# Altium PCB AIRZAI_NFC_READER_FLEX.PcbDoc (part 2 of 2)
Units mil, origin at the board's own origin, x right, y up, seen from the top; angles counter-clockwise.
Board outline 2897.24 x 5925.59 mil, 2 copper layers (Top Layer, Bottom Layer); 45 components, 43 nets, 193 pads, 92 vias.
Unrouted connection lines stored in the file: 129.
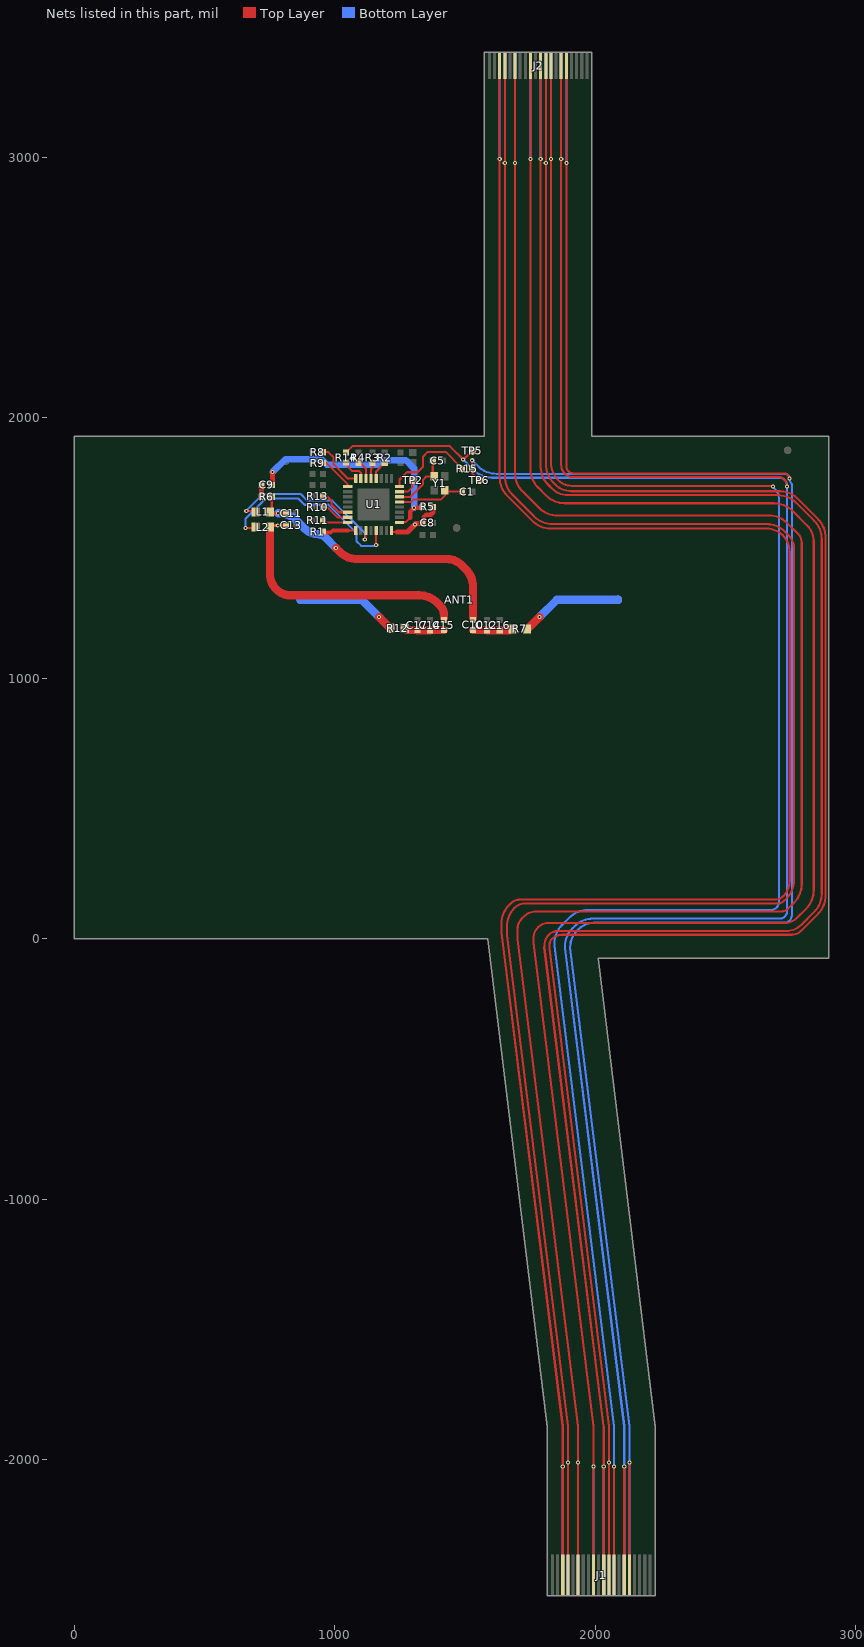
[diagram p2: the nets of this part, all layers, seen from the top]

## Via types
v1: diameter 16, hole 8, Top Layer to Bottom Layer, tented both sides, 81 vias
v2: diameter 19.68, hole 8, Top Layer to Bottom Layer, 9 vias
v3: diameter 30, hole 15, Top Layer to Bottom Layer, tented both sides, 2 vias

## Nets (pads, with @x,y where several pads share a name; then routed paths per layer and width w, separated by ;. In a path a pad name is that pad's centre, name@x,y a point inside that pad or via, vN(x,y) a via of type N, cw(c..) or ccw(c..) an arc to the next point about the centre after c; other vN are vias at no path point) (continued)
"LED Str DATA": J1.11 J2.11 | length 8505.9
  Top Layer w8: J2.11@1790.57,3351.56 1790.57,1810.63 ccw(c1885.55,1810.63) 1818.39,1743.47 1828.1,1733.76 ccw(c1898.81,1804.47) 1835.31,1727.22 ccw(c1895.09,1787) 1895.09,1702.46 2703.37,1702.46 cw(c2703.37,1609.34) 2769.21,1675.18 2840.55,1603.84 cw(c2769.84,1533.13) 2869.84,1533.13 2869.84,173.08 cw(c2769.84,173.08) 2840.55,102.36 2791.84,53.65 cw(c2731.49,114.01) 2731.49,28.65 1855.64,28.65 ccw(c1855.64,-19.15) 1821.84,14.65 ccw(c1864.02,-27.53) 1804.37,-27.53 1804.37,-32.08 ; 1804.14,-32.31 2032.5,-1873.7 v1@2032.5,-2027.53 ; J1.11@2032.69,-2444.11 v1(2032.69,-2027.53)
  Bottom Layer w8: v1@1790.57,2993.65 J2.11@1790.57,3351.56 ; J1.11@2032.69,-2444.11 v1(2032.69,-2027.53)
  other v1: 1790.57,2993.38
NetANT1_1: ANT1.1 R7.1 | length 396.1
  Top Layer w31.5: R7.1@1737.62,1189.13 ccw(c1737.62,1196.05) 1742.52,1191.16 v1(1785.73,1234.36)
  Bottom Layer w31.5: v1(1785.73,1234.36) 1852.15,1300.78 ; 1852.15,1300.8 ANT1.1@2087.74,1300.8
NetANT1_2: ANT1.2 R12.1 | length 391
  Top Layer w31.5: v1@1170.39,1234.46 R12.1@1213.5,1191.35
  Bottom Layer w31.5: ANT1.2@867.74,1300.8 1037.71,1300.8 ; 1037.71,1300.78 1103.88,1300.78 v1(1170.3,1234.36)
NetC1_2: C1.2 U1.21 Y1.3 | length 268.4
  Top Layer w8: U1.21@1248.63,1676.6 1294.02,1676.6 1303.71,1686.3 1408.5,1686.3 1422.75,1700.55 Y1.3@1422.75,1721.5 1427.86,1716.39 C1.2@1484.04,1716.39
NetC5_2: C5.2 U1.22 Y1.1 | length 236.2
  Top Layer w8: U1.22@1248.63,1696.29 1290.74,1696.29 1338.04,1743.59 1338.04,1760.52 1352.04,1774.52 1381.25,1774.52 Y1.1@1381.38,1774.65 1376.04,1779.99 C5.2@1376.04,1833.52
NetC9_1: C9.1 R6.2 | length 46.1
  Top Layer w20: R6.2@718.46,1696.21 718.78,1696.53 C9.1@718.78,1742.21
NetC9_2: C9.2 R5.2 U1.17 | length 919.8
  Top Layer w8: U1.17@1248.63,1597.86 1250.73,1599.97 1273.79,1599.97 1289.04,1615.21
  Top Layer w17: 1289.04,1615.21 1289.04,1638.83 v1(1304.4,1654.18) 1333.58,1654.18 R5.2@1336.89,1657.49
  Top Layer w20: C9.2@758.15,1742.21 C9.2@759.96,1744.03 ; C9.2@761.23,1744.03 v1(761.23,1791.09)
  Bottom Layer w25: v1(761.23,1791.09) 811.19,1841.04 948.42,1841.04 969.7,1819.76 1162.14,1819.76 1178.68,1836.3 1273.3,1836.3 1304.4,1805.21 v1(1304.4,1654.18)
NetC10_1: C10.1 C12.2 C16.2 R7.2 | length 152.8
  Top Layer w31.5: C10.1@1531.16,1184.44 1583.72,1184.44 C12.2@1584.06,1184.09 C16.2@1633.09,1184.1 1670.36,1184.1 ccw(c1670.36,1201.27) R7.2@1682.5,1189.13
NetC10_2: C10.2 C11.2 L1.2 R6.1 | length 1115.1
  Top Layer w10: R6.1@757.83,1696.21 757.83,1645.03 L1.2@751.02,1638.22 756.02,1633.21 v1(782.61,1633.21) C11.2@812.21,1633.21 C11.2@815.21,1633.21
  Top Layer w31.5: v1@1004.47,1499.65 1018.99,1485.13 ccw(c1086.59,1552.72) 1086.59,1457.13 1430.12,1457.13 cw(c1430.12,1375.18) 1488.06,1433.13 1501.87,1419.32 cw(c1431.16,1348.61) 1531.16,1348.61 1531.16,1262.12 C10.2@1531.16,1230.12
  Bottom Layer w31.5: v1(782.61,1633.21) 784.55,1633.21 cw(c784.55,1533.21) 855.26,1603.93 887.68,1571.51 ccw(c932.06,1615.9) 932.06,1553.13 cw(c932.06,1507.42) 964.37,1539.75 1003.53,1500.59 1003.53,1499.97 v1(1003.84,1499.65)
NetC13_1: C13.1 C15.2 L2.2 | length 1011.1
  Top Layer w10: L2.2@751.02,1580.22 757.02,1586.21 v1(781.24,1586.21) C13.1@812.21,1586.21 C13.1@815.21,1586.21
  Top Layer w31.5: L2.2@751.02,1580.22 751.02,1400.62 ccw(c836.52,1400.62) 776.06,1340.17 ccw(c829.27,1393.37) 829.27,1318.13 1323.64,1318.13 cw(c1323.64,1218.13) 1394.35,1288.84 1404.06,1279.13 cw(c1368.36,1243.42) 1418.85,1243.42 C15.2@1418.85,1231.13
NetC14_1: C14.1 C15.1 C17.1 R12.2 | length 152.3
  Top Layer w31.5: R12.2@1268.62,1191.35 ccw(c1285.67,1208.4) 1285.67,1184.28 C17.1@1317.06,1184.28 1317.26,1184.09 C14.1@1365.75,1184.09 1365.94,1184.28 C15.1@1418.85,1184.28
NetL1_1: L1.1 U1.11 | length 646.1
  Top Layer w8: v1(660.24,1641.98) 692.14,1641.98 L1.1@695.9,1638.22 ; v1(1115.24,1531.98) 1117.63,1531.98 1116.77,1532.84 1116.77,1535.67 1118.58,1537.48 1118.58,1566.24 U1.11@1119.54,1567.19
  Bottom Layer w8: v1(660.24,1641.98) 725.91,1707.65 868.43,1707.65 894.42,1681.65 990.84,1681.65 1115.24,1557.25 v1(1115.24,1531.98)
NetL2_1: L2.1 U1.13 | length 761
  Top Layer w8: v1(657.24,1575.98) 691.67,1575.98 L2.1@695.9,1580.22 ; v1(1158.91,1510.65) U1.13@1158.91,1567.19
  Bottom Layer w8: v1(657.24,1575.98) 657.24,1611.53 735.36,1689.65 859.85,1689.65 883.84,1665.65 974.84,1665.65 1082.84,1557.65 1082.84,1526.77 1101.63,1507.98 1156.23,1507.98 v1(1158.91,1510.65)
NetR1_1: R1.1 U1.9 | length 124.2
  Top Layer w8: 1050.58,1566.37 1079.7,1566.73 U1.9@1080.17,1567.19
  Top Layer w15: R1.1@959.38,1558.81 984.01,1558.71 991.95,1566.59 1050.58,1566.37
NetR2_2: R2.2 U1.28 | length 74.9
  Top Layer w8: U1.28@1158.91,1766.33 1158.91,1793.48 1192.37,1826.95 R2.2@1192.04,1827.27
NetR3_2: R3.2 U1.29 | length 64.2
  Top Layer w8: U1.29@1139.22,1766.33 1139.22,1802.56 1146.04,1809.39 1146.04,1826.27 R3.2@1145.04,1827.27
NetR4_2: R4.2 U1.30 | length 70.2
  Top Layer w8: R4.2@1097.29,1827.27 1119.54,1805.03 U1.30@1119.54,1766.33
NetR8_1: R8.1 U1.32 | length 193.9
  Top Layer w8: R8.1@955.96,1865.69 R8.1@954.1,1867.54 ; R8.1@962.12,1867.54 R8.1@954.1,1867.54 ; U1.32@1080.17,1766.33 1050.3,1766.33 995.42,1821.21 995.42,1847.36 975.23,1867.54 R8.1@954.1,1867.54
NetR9_1: R9.1 U1.1 | length 138
  Top Layer w8: R9.1@954.1,1825.76 968.42,1825.76 1049.5,1744.68 U1.1@1049.5,1735.66
NetR10_1: R10.1 U1.7 | length 110
  Top Layer w8: R10.1@954.08,1652.73 974.45,1652.73 1009.63,1617.55 U1.7@1049.5,1617.55
NetR11_1: R11.1 U1.8 | length 102.7
  Top Layer w8: R11.1@954.26,1596.73 R11.1@959.56,1602.03 ; R11.1@954.26,1597.86 U1.8@1049.5,1597.86
NetR13_1: R13.1 U1.6 | length 129.2
  Top Layer w8: R13.1@954.26,1696.73 972.06,1696.73 986.58,1682.21 986.58,1666.6 1016.1,1637.08 1049.34,1637.08 U1.6@1049.5,1637.23
NetR14_1: R14.1 U1.31 | length 97.5
  Top Layer w8: R14.1@1050.62,1827.39 1052.04,1825.97 1052.04,1809.82 1067.11,1794.76 1094.42,1794.76 1099.85,1789.33 U1.31@1099.85,1766.33
NetR15_1: R15.1 U1.24 | length 361.1
  Top Layer w8: U1.24@1248.63,1735.66 1248.63,1762.49 1276.79,1790.65 1317.58,1790.65 1338.84,1811.91 1338.84,1850.65 1356.83,1868.64 1425.85,1868.64 1488.16,1806.34 R15.1@1488.16,1804.08
NetTP2_1: TP2.1 U1.23 | length 94.4
  Top Layer w8: U1.23@1248.63,1715.97 1279.83,1715.97 1299.04,1735.18 TP2.1@1299.04,1771.21
NFC_INT: J1.12 J2.12 | length 8529.3
  Top Layer w8: J2.12@1810.25,3351.56 1810.25,1821.03 ccw(c1910.25,1821.03) 1839.54,1750.32 1846.39,1743.47 ccw(c1908.74,1805.82) 1908.74,1717.65 2712.08,1717.65 cw(c2712.08,1631.08) 2773.29,1692.29 2855.55,1610.03 cw(c2784.84,1539.32) 2884.84,1539.32 2884.84,166.08 cw(c2784.84,166.08) 2855.55,95.36 2788.84,28.65 cw(c2755.04,62.45) 2755.04,14.65 1872.47,14.65 ccw(c1872.47,-39.97) 1833.84,-1.35 ccw(c1855.57,-23.07) 1824.84,-23.07 1824.84,-36.35 ; 1824.53,-36.39 2052.38,-1873.7 v1(2052.38,-2011.53) J1.12@2052.38,-2444.11
  Bottom Layer w8: v1(1810.25,2977.38) J2.12@1810.25,3351.56 ; J1.12@2052.38,-2444.11 v1(2052.38,-2011.53)
PWM1: J1.4 J2.4 | length 8627.8
  Top Layer w8: J2.4@1652.77,3351.56 1652.77,1774.51 ccw(c1752.77,1774.51) 1682.06,1703.8 1765.1,1620.76 ccw(c1835.81,1691.47) 1835.81,1591.47 2657.6,1591.47 cw(c2657.6,1491.47) 2728.31,1562.18 2742.84,1547.65 cw(c2694.56,1499.37) 2762.84,1499.37 2762.84,224.08 cw(c2662.84,224.08) 2733.55,153.36 2725.84,145.65 cw(c2699.29,172.21) 2699.29,134.65 1730.88,134.65 ccw(c1730.88,76.61) 1689.84,117.65 1689.78,117.59 ccw(c1760.49,46.88) 1660.49,46.88 1660.49,16.49 ; 1660.49,13.84 1660.49,16.49 ; J1.4@1894.9,-2444.11 v1(1894.9,-2011.53) 1894.9,-1873.7 1660.81,13.88 1660.49,16.49
  Bottom Layer w8: v1(1652.77,2977.38) J2.4@1652.77,3351.56 ; J1.4@1894.9,-2444.11 v1(1894.9,-2011.53)
PWM2: J1.3 J2.3 | length 8603.9
  Top Layer w8: J2.3@1633.09,3351.56 1633.09,1770.5 ccw(c1733.09,1770.5) 1662.38,1699.79 1758.4,1603.76 ccw(c1829.11,1674.47) 1829.11,1574.47 2657.51,1574.47 cw(c2657.51,1486.32) 2719.84,1548.65 cw(c2654.66,1483.47) 2746.84,1483.47 2746.84,221.59 cw(c2664.9,221.59) 2722.84,163.65 cw(c2689.04,197.45) 2689.04,149.65 1711.06,149.65 ccw(c1711.06,98.44) 1674.85,134.66 1669.24,129.05 ccw(c1739.95,58.34) 1639.95,58.34 1639.95,23.42 1875.21,-1873.7 v1(1875.21,-2027.53) J1.3@1875.21,-2444.11
  Bottom Layer w8: v1@1633.09,2993.65 J2.3@1633.09,3351.56 ; J1.3@1875.21,-2444.11 v1(1875.21,-2027.53)
  other v1: 1633.09,2993.38
SCL: J1.15 J2.15 R14.2 TP5.1 | length 10030.3
  Top Layer w8: R14.2@1043.42,1866.71 1067.4,1890.69 1441.61,1890.69 v1(1492.84,1839.46) 1494.33,1839.46 1527.2,1872.34 TP5.1@1528.69,1872.34 ; 1869.26,2817.43 1869.26,1819.99 ccw(c1920.9,1819.99) 1884.39,1783.47 ccw(c1910.94,1810.03) 1910.94,1772.47 2705.16,1772.47 cw(c2701.72,1738.53) 2725.84,1762.65 cw(c2699.29,1736.1) v1(2736.84,1736.1) ; 1869.31,2817.43 J2.15@1869.31,3351.56 ; J1.15@2111.43,-2444.11 2111.43,-2044.58 2111.39,-2044.53 v1(2111.39,-2027.58) v1@2111.43,-2027.53
  Bottom Layer w8: v1(1492.84,1839.46) 1533.54,1798.76 ccw(c1604.25,1869.47) 1604.25,1769.47 2705.84,1769.47 cw(c2705.84,1738.47) 2736.84,1738.47 v1(2736.84,1736.1) 2736.84,106.04 cw(c2706.46,106.04) 2727.94,84.55 cw(c2708.87,103.62) 2708.87,76.65 1999.01,76.65 1998.92,76.74 1991.35,76.74 ccw(c1991.35,-23.26) 1920.64,47.45 1911.84,38.65 ccw(c1980.08,-29.58) 1883.58,-29.58 1883.58,-36.35 2111.43,-1873.7 ; v1(1869.26,2993.43) J2.15@1869.31,3351.56 ; 2111.39,-1873.7 2111.39,-2044.53 2111.43,-2044.58 J1.15@2111.43,-2444.11
SDA: J1.16 J2.16 R15.2 TP6.1 | length 9603.2
  Top Layer w8: v1(1527.53,1836.3) 1527.53,1808.65 1527.84,1808.34 1527.84,1786.47 TP6.1@1554.84,1759.47 ; J2.16@1888.99,3351.56 1888.99,1814.74 ccw(c1917.65,1814.74) 1897.39,1794.47 ccw(c1916.7,1813.79) 1916.7,1786.47 2725.58,1786.47 cw(c2725.58,1766.58) 2739.64,1780.65 2740.75,1779.54 cw(c2727.86,1766.65) v1(2746.09,1766.65) ; J1.16@2131.12,-2444.11 v1(2131.12,-2011.53) 2131.12,-2027.53
  Bottom Layer w8: v1(1527.53,1836.3) 1550.07,1813.76 ccw(c1620.78,1884.47) 1620.78,1784.47 2728.27,1784.47 cw(c2728.27,1766.65) v1(2746.09,1766.65) 2746.09,1764.94 ccw(c2772.56,1764.94) 2753.84,1746.21 cw(c2749.01,1741.39) 2755.84,1741.39 2755.84,94.21 cw(c2718.29,94.21) 2744.84,67.65 cw(c2727.94,84.55) 2727.94,60.65 1993.37,60.65 ccw(c1993.37,-17.87) 1937.84,37.65 1930.13,29.94 ccw(c1994.04,-33.98) 1903.65,-33.98 ; v1(1888.99,2977.38) J2.16@1888.99,3351.56 ; 1903.22,-34.41 2131.32,-1873.7 ; J1.16@2131.12,-2444.11 2131.12,-1873.7
SPR_GPO1: J1.9 J2.9 | length 8532.6
  Top Layer w8: J2.9@1751.2,3351.56 1751.2,1802.76 ccw(c1851.2,1802.76) 1780.49,1732.05 1811.77,1700.76 ccw(c1882.48,1771.47) 1882.48,1671.47 2686.6,1671.47 cw(c2686.6,1571.47) 2757.31,1642.18 2814.09,1585.4 cw(c2754.35,1525.65) 2838.84,1525.65 2838.84,185.08 cw(c2738.84,185.08) 2809.55,114.36 2774.84,79.65 cw(c2726.56,127.94) 2726.56,59.65 1819.47,59.65 ccw(c1819.47,5.03) 1780.84,43.65 ccw(c1824.72,-0.22) 1762.67,-0.22 1762.67,-15.37 1993.13,-1873.7 v1@1993.13,-2027.53 ; J1.9@1993.32,-2444.11 v1(1993.32,-2027.53)
  Bottom Layer w8: v1@1751.2,2993.65 J2.9@1751.2,3351.56 ; J1.9@1993.32,-2444.11 v1(1993.32,-2027.53)
  other v1: 1751.2,2993.38
SPR_GPO2: J1.6 J2.6 | length 8599
  Top Layer w8: J2.6@1692.14,3351.56 1692.14,1787.14 ccw(c1792.14,1787.14) 1721.43,1716.43 1784.1,1653.76 ccw(c1854.81,1724.47) 1854.81,1624.47 2666.82,1624.47 cw(c2666.82,1524.47) 2737.53,1595.18 2779.06,1553.65 cw(c2745.8,1520.39) 2792.84,1520.39 2792.84,209.08 cw(c2692.84,209.08) 2763.55,138.36 2739.84,114.65 cw(c2715.7,138.8) 2715.7,104.65 1775.54,104.65 ccw(c1775.54,32.96) 1724.84,83.65 1718.81,77.62 ccw(c1759.78,36.65) 1701.84,36.65 1701.84,-0.88 1702.04,-1.07 1934.27,-1873.7 v1(1934.27,-2011.53) J1.6@1934.27,-2444.11
  Bottom Layer w8: v1(1692.14,2977.38) J2.6@1692.14,3351.56 ; J1.6@1934.27,-2444.11 v1(1934.27,-2011.53)
TOFINT: J1.13 J2.13 | length 8189.4
  Top Layer w8: J2.13@1829.94,3351.56 1829.94,1828.15 ccw(c1927.07,1828.15) 1858.39,1759.47 ccw(c1909.08,1810.17) 1909.08,1738.47 v1@2679.33,1738.47 ; J1.13@2072.06,-2444.11 v1(2072.06,-2027.53)
  Bottom Layer w8: v1@1829.94,2993.65 J2.13@1829.94,3351.56 ; J1.13@2072.06,-2444.11 2072.06,-1873.7 1842.96,-26.29 1842.96,-18.65 cw(c1942.96,-18.65) 1872.25,52.06 1900.55,80.36 cw(c1971.26,9.65) 1971.26,109.65 2674.11,109.65 ccw(c2674.11,140.38) 2695.84,118.65 ccw(c2674.11,140.38) 2704.84,140.38 2704.84,1692.65 ccw(c2658.97,1692.65) 2691.41,1725.09 v1@2682.55,1733.95
  other v1: 2682.55,1735.95 1829.94,2993.38
VMID: C8.1 R5.1 U1.16 | length 227.7
  Top Layer w8: U1.16@1217.96,1567.19 1217.96,1563.62 1220.06,1561.52 1240.04,1561.52
  Top Layer w17: C8.1@1337.38,1596.04 1340.69,1599.35 1340.69,1617.13 1350.65,1627.09 1368.23,1627.09 1378.23,1637.09 1378.23,1655.52 R5.1@1376.26,1657.49
  Top Layer w20: 1240.04,1561.52 1279.19,1561.52 v1(1307.58,1589.91) 1311.9,1594.23 1335.57,1594.23 C8.1@1337.38,1596.04
pads on no net: U1.19 U1.20 U1.25 U1.26 U1.27
copper on no net:
  other v3: 1412.74,269.3 1542.74,387.41

## Polygon pours and split planes (outlines as drawn)
GND on Top Layer "gnd top" (hatched 45Degree grid 30 track 9.5, remove dead copper, pour order 3): 1626.84,1929.12 1626.84,1531.65 561.84,1531.65 561.84,1929.12
no net on Top Layer "3.3V Input Top" (solid, pour order 0): -81.48,1878.45

## Keep-outs
Keep-Out Layer:
  the board outline again, w0.5

## Other copper
Top Layer:
  rectangle net +5: 1926.39,1859.65 2790.84,1908.65
  rectangle net +5: 1926.39,1859.65 1978.26,2679.47
  rectangle net 3V3: 1923.26,2752.65 1945.26,3229.65
  rectangle net +5: 1953.26,1859.65 1978.26,3238.65
  region net GND: 1828.39,-1883.33 1857.9,-1879.71 1618.91,66.68 1589.4,63.06
  rectangle net +5: 2195.39,-2345.53 2220.39,-1999.35
  rectangle net 3V3: 2165.39,-2343.53 2187.39,-1999.35
  pour cut-out: 1596.26,1933.65 1632.09,1933.65 1633.09,1934.64 1633.09,1673.37 1632.99,1673.37 1596.26,1710.1
  pour cut-out: 1048.67,1767.16 1048.67,1767.15 1048.67,1566.37 1249.46,1566.37 1249.46,1767.16
  pour cut-out: 829.84,1665.76 752.84,1665.76 752.84,1459.65 1115.84,1459.65 1115.84,1574.65 920.33,1574.65 886.84,1608.14 886.84,1665.76 830.46,1665.76 829.84,1665.14
  region net SPR_GPO1: 1780.84,43.65
  pour cut-out: 1574.03,3402.74 1987.42,3402.74 1987.42,3292.07 1574.03,3292.07
  pour cut-out: 2688.84,1464.65 266.64,1464.65 266.64,223.55 2688.84,223.55
  pour cut-out: 1816.16,-2355.53 2229.54,-2355.53 2229.54,-2522.85 1816.16,-2522.85
Bottom Layer:
  rectangle net GND: 1088.84,1610.65 1206.84,1728.65
  rectangle net +5: 1926.39,1859.65 2788.84,1915.65
  rectangle net 3V3: 1922.84,2780.47 1945.26,3232.65
  rectangle net 3V3: 1844.39,2692.47 1945.39,2826.65
  rectangle net 3V3: 1924.39,2692.47 1945.39,2808.47
  rectangle net 3V3: 1781.84,1797.76 1906.39,2826.65
  rectangle net +5: 1926.39,1859.65 1978.26,2679.47
  rectangle net +5: 1953.26,1859.65 1978.26,3252.65
  region net 3V3: 2165.59,-1879.21 2187.38,-1876.53 1961.59,-37.61 1939.8,-40.28
  region net +5: 2196.39,-1873.7 2220.65,-1870.72 1998.92,-64.86 1974.65,-67.84
  rectangle net +5: 2195.39,-2345.53 2220.39,-1866.53
  rectangle net 3V3: 2165.39,-2343.53 2187.39,-1875.34
  pour cut-out: 1574.03,3402.74 1987.42,3402.74 1987.42,3292.07 1574.03,3292.07
  pour cut-out: 266.64,223.55 2688.84,223.55 2688.84,1464.65 266.64,1464.65
  pour cut-out: 165.97,120.1
  pour cut-out: 1816.16,-2522.85 1816.16,-2355.53 2229.54,-2355.53 2229.54,-2522.85

## Silkscreen, mask and mechanical layers (free items; w line width, h text height)
Top Overlay:
  text "NFC FLEX Rev A, JUNE 2019" at 35.51,25.65 h60
Bottom Overlay:
  circle w12: c1593.84,3280.65 r4
  circle w20: c1468.16,833.15 r10.82
  circle w12: c1835.35,-2343.53 r4
  lines w20: 1271.37,1117.76 ccw(c1468.16,833.15) 1285.73,539.12 ; 1299.35,1070 ccw(c1468.16,833.15) 1311.56,588.05 ; 1325.34,1020.06 ccw(c1468.16,833.15) 1338.12,637.13 ; 1359.14,972.36 ccw(c1468.16,833.15) 1365.75,689.01 ; 1387.01,930.52 ccw(c1468.16,833.15) 1392.3,731.61 ; 1419.84,774.41 cw(c1468.16,833.15) 1420.16,892.15 ; 1516.16,892.15 cw(c1468.16,833.15) 1516.47,774.41 ; 1544.02,731.61 ccw(c1468.16,833.15) 1549.31,930.52 ; 1570.57,689.01 ccw(c1468.16,833.15) 1577.17,972.36 ; 1598.19,637.13 ccw(c1468.16,833.15) 1610.98,1020.06 ; 1624.75,588.05 ccw(c1468.16,833.15) 1636.96,1070 ; 1650.58,539.12 ccw(c1468.16,833.15) 1664.95,1117.76
  text "J2" at 1633.84,3230.65 h28
  text "J1" at 1881.84,-2323.35 h28
Mechanical 1:
  drawing of 4044 lines, arcs and shapes, not listed
  text "Bend End" at 1321.16,3246 h19.68
  text "9,35" at 6660.15,3199.17 h137.8
  text "Bend Start" at 1320.16,3145 h19.68
  text "1,9" at 7945.65,2510.7 h137.8 r90
  text "Bend End" at 1320.16,2464 h19.68
  text "Bend Start" at 1319.16,2363 h19.68
  text "18,3" at 8554.67,2351.04 h137.8 r90
  text "Top Ben End" at 1311.02,2201.12 h19.68
  text "Top Ben Start" at 1283.02,2108.12 h19.68
  text "5,7" at 6703.11,1805.32 h137.8
  text "10,6" at 2365.45,1585.49 h137.8
  text "42,2" at 8553.8,1160.15 h137.8 r90
  text "3,2" at 7077.3,704.53 h137.8
  text "Old Bend Start" at 472.06,482.13 h19.68
  text "Back Metal Plate Start" at 316.06,224.13 h19.68
  text "56" at 8546.04,-772.92 h137.8 r90
  text "~}" at 1165.71,-1300.81 h137.8
  text "3,2" at 6839.44,-1852.95 h137.8
  text "Bottom Ben End" at 1497.84,-2176.35 h19.68
  text "Bottom Ben Start" at 1472.84,-2273.35 h19.68
  text "2" at 6925.2,-2426.29 h137.8
  text "6" at 8543.96,-2431.68 h137.8 r90
Mechanical 2:
  rectangle: 2628.84,1705.65 2897.42,1928.65
  rectangle: 1363.32,223.55 1591.84,432.55
  rectangle: 1143.84,1127.65 1808.84,1294.65
  region: 1626.84,1929.12 647.84,1929.12 647.84,1479.65 1626.84,1479.65
  rectangle: 1574.03,2918.65 1987.42,3062.65
  rectangle: 1814.94,-2085.35 2229.84,-1965.35
  rectangle: 1574.03,3276.65 1987.42,3402.74
  rectangle: 1816.16,-2522.85 2229.54,-2346.33
  lines w8: -333.84,467.15 66.16,467.15 ; 16.16,467.15 96.16,467.15 cw(c96.16,346.44) 181.51,431.79 1980.8,-1367.5 cw(c1895.45,-1452.85) 2016.16,-1452.85 2016.16,-1953.35 ; 906.16,1447.65 922.84,1469.65 ; 940.16,1447.65 922.84,1469.65 ; 1106.84,1256.52 1128.84,1273.83 ; 1106.84,1290.52 1128.84,1273.83 ; 1331.84,315.34 1353.84,332.65 ; 1331.84,349.34 1353.84,332.65 ; 1450.84,2992.65 1563.84,2992.65 ; 1541.84,2975.34 1563.84,2992.65 ; 1541.84,3009.34 1563.84,2992.65 ; 1542.84,3248.34 1564.84,3265.65 ; 1542.84,3282.34 1564.84,3265.65 ; 1698.84,1395.65 1698.84,2580.65 1450.84,2828.65 1450.84,3217.65 1498.84,3265.65 1564.84,3265.65 ; 1872.53,-2315.35 1889.84,-2337.35 ; 1906.53,-2315.35 1889.84,-2337.35 ; 1998.84,-1931.35 2016.16,-1953.35 ; 2016.16,-1712.35 2016.16,-1724.03 2016.16,-1727.03 1778.84,-1964.35 1778.84,-2110.35 1889.84,-2221.35 1889.84,-2337.35 ; 2032.84,-1931.35 2016.16,-1953.35 ; 2746.16,1668.65 2762.84,1690.65 ; 2780.16,1668.65 2762.84,1690.65 ; 66.16,467.15 ccw(c66.16,587.86) 151.51,502.5 922.84,1273.83 ; 66.16,467.15 989.35,467.15 1123.84,332.65 1353.84,332.65 ; 922.84,1273.83 923.02,1273.83 1044.84,1395.65 2586.84,1395.65 2762.84,1571.65 2762.84,1690.65 ; 922.84,1273.83 1128.84,1273.83 ; 922.84,1273.83 922.84,1469.65
  text "Stiffener Locations" at -883.84,452.47 h30
Mechanical 4:
  the board outline again, w0.5
Mechanical 17:
  text "NFC Flex" at 6107.94,-4984.78 h157.48
  text "NFCFLX-061319-001" at 6118.84,-5265.35 h127.95
  text "1" at 8480.67,-5287.16 h59.06
  text "1" at 8669.65,-5287.16 h59.06
  text "NOTES: /  / 1. ALL ASSEMBLY MATERIALS TO BE RoHS COMPLIANT. /  / 2. MATERIAL: /           • FLEXIBLE METAL CLAD DIELECTRIC IAW                 /             IPC-4204/11 E1E2 O0/0 CU W7 T/T /           • STIFFENER IAW IPC-4203/1-E1E8M1 /  / 3. FINISH:  IMMERSION GOLD /  / ALL EXPOSED CONDUCTIVE PATTERN AREAS NOT COVERED WITH COVERLAY MATERIAL OR OTHER PLATING  / SHALL BE IMMERSION GOLD (0.000030-0.000090 mm) OVER ELECTROLESS NICKEL (0.001-0.006 mm). /  / 4. LEGEND SHALL BE WHITE, PERMANENT, ORGANIC, NON-CONDUCTIVE UV OR EPOXY TYPE INK APPLIED  / TO THE TOP SIDE OF THE BOARD. THERE SHALL BE NO LEGEND ON ANY SOLDERABLE COMPONENT LAND. /  / 5. ALL ASSEMBLY MATERIALS TO BE RoHS COMPLIANT. /  / 6. ANY LABELS OR COMPOSITION OF, APPLIED TO THE BOARD NEED TO BE APPROVIED BY AIRZAI /  / 7. MINIMUM TRACE WIDTHS: /           EXTERNAL: 0.203 mm  INTERNAL: N/A /  / 8. MINIMUM SPACE BETWEEN FEATURES: /          EXTERNAL: 0.15 mm  INTERNAL: N/A /  / 9. Overall Board Thickness: 0.1mm /  / 10. Stiffener /          Thickness: 0.2mm /          Placement Layer: Bottom /          Location: Mentioned on Layer .GM2" at -5325,-5320 h78.74
Mechanical 18:
  lines w5: -5611.01,-3191.11 -5411.01,-3191.11 ; -5611.01,-816.11 -5411.01,-816.11 ; -5611.01,1558.89 -5411.01,1558.89 ; -3111.01,-5566.11 -3111.01,-5366.11 ; -3111.01,3733.89 -3111.01,3933.89 ; -611.01,-5566.11 -611.01,-5366.11 ; -611.01,3733.89 -611.01,3933.89 ; 1888.99,-5566.11 1888.99,-5366.11 ; 1888.99,3733.89 1888.99,3933.89 ; 4388.99,-5566.11 4388.99,-5366.11 ; 4388.99,3733.89 4388.99,3933.89 ; 4688.2,-5068.32 9188.2,-5068.32 ; 4688.2,-4826.59 5758.86,-4826.59 ; 4688.2,-4592.53 5758.86,-4592.53 ; 4688.2,-4381.71 5758.86,-4381.71 ; 4688.99,-5366.11 9188.99,-5366.11 ; 5313.98,-5369.3 5313.98,-4169.3 ; 5758.86,-5368.32 5758.86,-4168.32 ; 5758.86,-4701.39 9188.05,-4701.39 ; 6098.83,-4168.32 9188.2,-4168.32 ; 6188.2,-4168.32 4688.2,-4168.32 ; 6888.99,-5566.11 6888.99,-5366.11 ; 6888.99,3733.89 6888.99,3933.89 ; 8811.82,-5368.32 8811.82,-5068.32 ; 9188.99,-4166.11 9188.99,-5366.11 ; 9188.99,-3191.11 9388.99,-3191.11 ; 9188.99,-816.11 9388.99,-816.11 ; 9188.99,1558.89 9388.99,1558.89 ; 3288.2,-5368.32 3288.2,-4168.32 4688.2,-4168.32 ; 3288.2,-5368.32 4688.2,-5368.32 ; 3288.2,-5368.32 4688.2,-5368.32 ; 4688.2,-5368.32 4688.2,-4168.32 ; 4688.2,-5368.32 9188.2,-5368.32 ; 4688.2,-5368.32 9188.2,-5368.32 ; 9188.2,-5368.32 9188.2,-4168.32 ; 9188.2,-5368.32 9188.2,-4168.32 ; 9188.99,-5366.11 -5411.01,-5366.11 -5411.01,3733.89 9188.99,3733.89 9188.99,-5366.11 ; -5611.01,-5566.11 9388.99,-5566.11 9388.99,3933.89 -5611.01,3933.89 -5611.01,-5566.11
  text "1" at -4379.67,3803.89 h70
  text "2" at -1884.01,3803.89 h70
  text "3" at 605.33,3803.89 h70
  text "4" at 3112,3803.89 h70
  text "5" at 5610.99,3803.89 h70
  text "6" at 8115.99,3803.89 h70
  text "A" at -5536.01,2660.89 h70
  text "A" at 9263.99,2660.89 h70
  text "B" at -5536.01,280.89 h70
  text "B" at 9263.99,280.89 h70
  text "C" at -5536.01,-2094.11 h70
  text "C" at 9263.99,-2094.11 h70
  text "AIRZAI PROPRIETARY & CONFIDENTIAL" at 4844.11,-4057.45 h127.95
  text "DATE:" at 5344.49,-4230.53 h45
  text "ENGINEER:" at 4710.64,-4236.82 h45
  text "UNLESS OTHERWISE SPECIFIED" at 3387.8,-4297.45 h59.06
  text "06/13/19" at 5351.83,-4339.14 h59.06
  text "FD" at 4903.51,-4345.41 h78.74
  text "DIMENSIONS ARE IN MM" at 3509.85,-4423.44 h59.06
  text "PCB DESIGNER:" at 4706.7,-4445.21 h45
  text "DATE:" at 5332.68,-4447.06 h45
  text "D" at -5536.01,-4464.11 h70
  text "D" at 9263.99,-4464.11 h70
  text "AIRZAI" at 6049.82,-4502.33 h127.95
  text "TOLERANCES" at 3710.64,-4549.42 h59.06
  text "06/13/19" at 5351.83,-4553.71 h59.06
  text "DFM" at 4877.13,-4555.29 h78.74
  text "DATE:" at 5332.68,-4659.66 h45
  text "CHECK" at 4706.7,-4661.75 h45
  text "ANGULAR" at 4194.89,-4706.9 h59.06
  text "DECIMALS" at 3391.74,-4718.71 h59.06
  text "TITLE:" at 5810.65,-4765.12 h45
  text "FD" at 4942.88,-4778.48 h78.74
  text ".XX +/- .127MM" at 3344.5,-4876.19 h59.06
  text "+/-" at 4183.08,-4880.13 h59.06
  text "REL" at 4718.51,-4892.73 h45
  text "DATE:" at 5348.43,-4899.82 h45
  text "FD" at 4933.04,-4995.01 h78.74
  text ".XXX +/- .080MM" at 3332.68,-5037.61 h59.06
  text "REV:" at 8834.26,-5132.1 h45
  text "SCALE:" at 5353.94,-5132.89 h45
  text "DWG NO:" at 5805.12,-5140.76 h45
  text "SIZE" at 4718.51,-5143.91 h45
  text "B" at 4922.25,-5274.5 h120
  text "DO NOT SCALE DRAWING" at 3387.8,-5277.77 h70.87
  text "B" at 8917.93,-5293.67 h120
  text "1:1" at 5402.57,-5298.12 h120
  text "SHEET" at 8269.69,-5329.74 h45
  text "OF" at 8533.47,-5329.74 h45
  text "1" at -4379.67,-5496.11 h70
  text "2" at -1884.01,-5496.11 h70
  text "3" at 605.33,-5496.11 h70
  text "4" at 3112,-5496.11 h70
  text "5" at 5610.99,-5496.11 h70
  text "6" at 8115.99,-5496.11 h70